# EAGLE board nutzen_04 (EAGLE 9.6.2), part 1 of 3
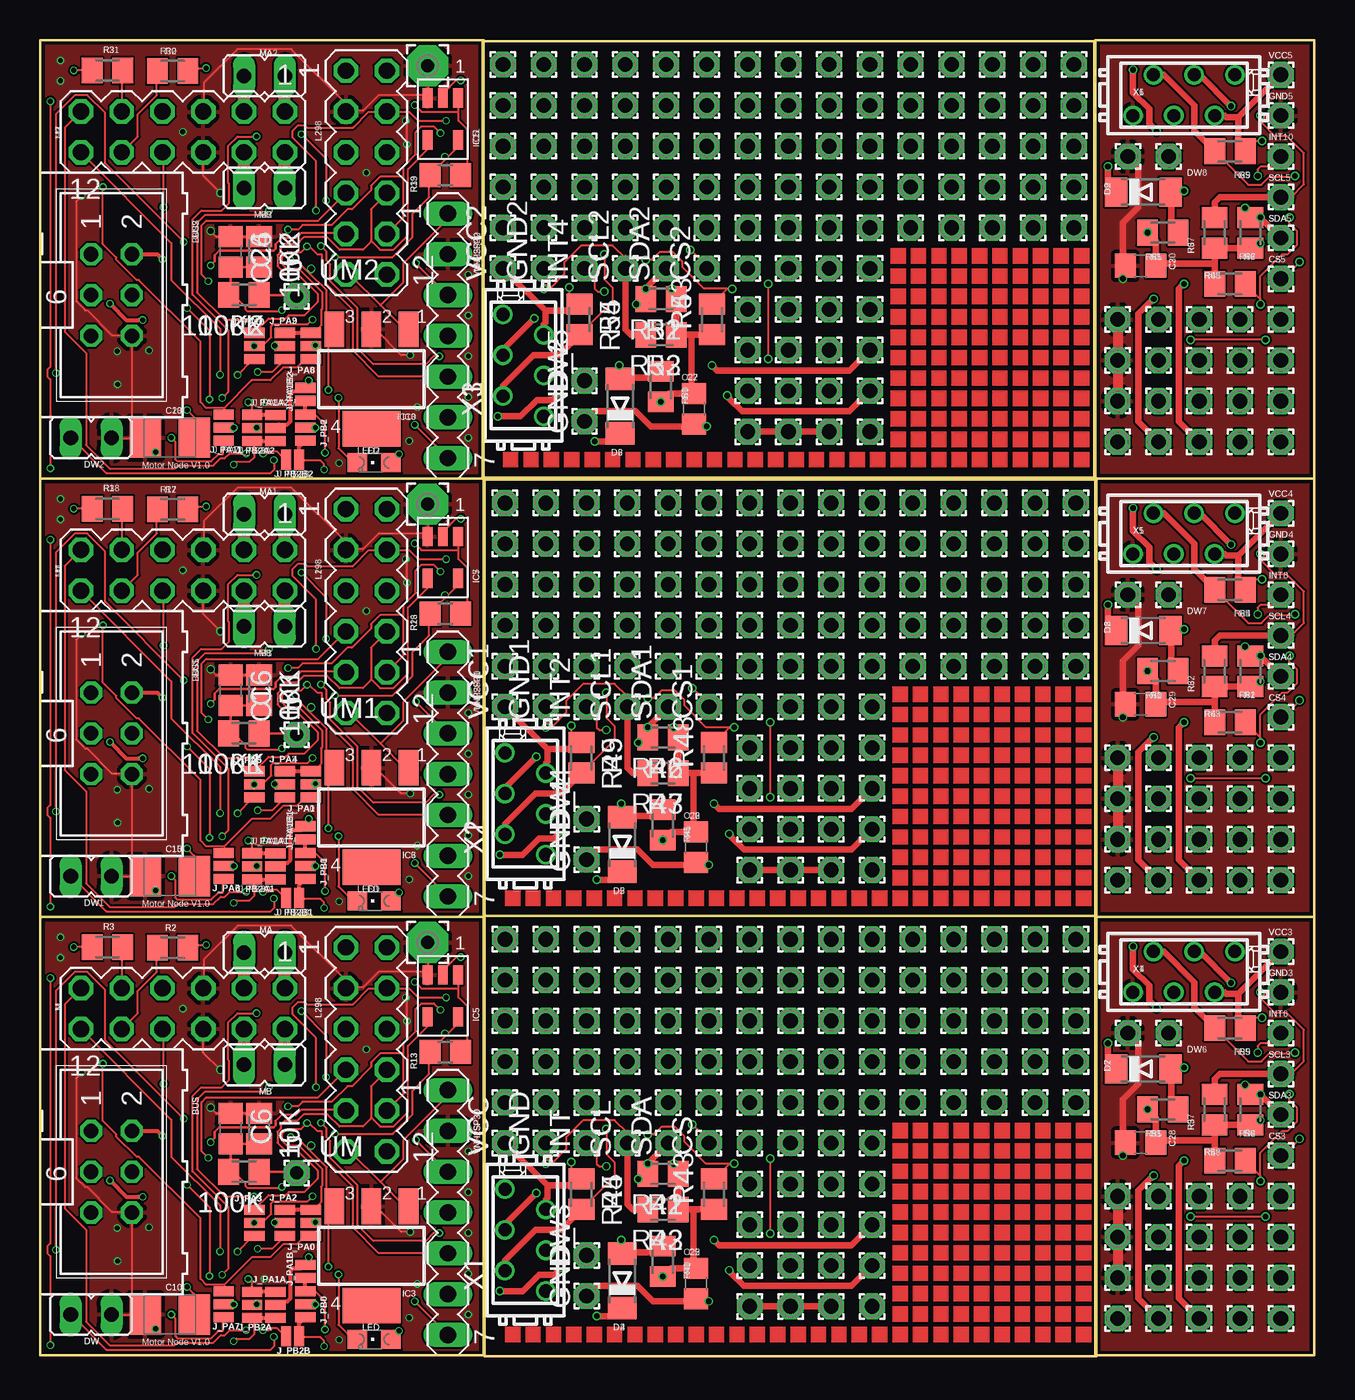
[diagram p0: board, top side]
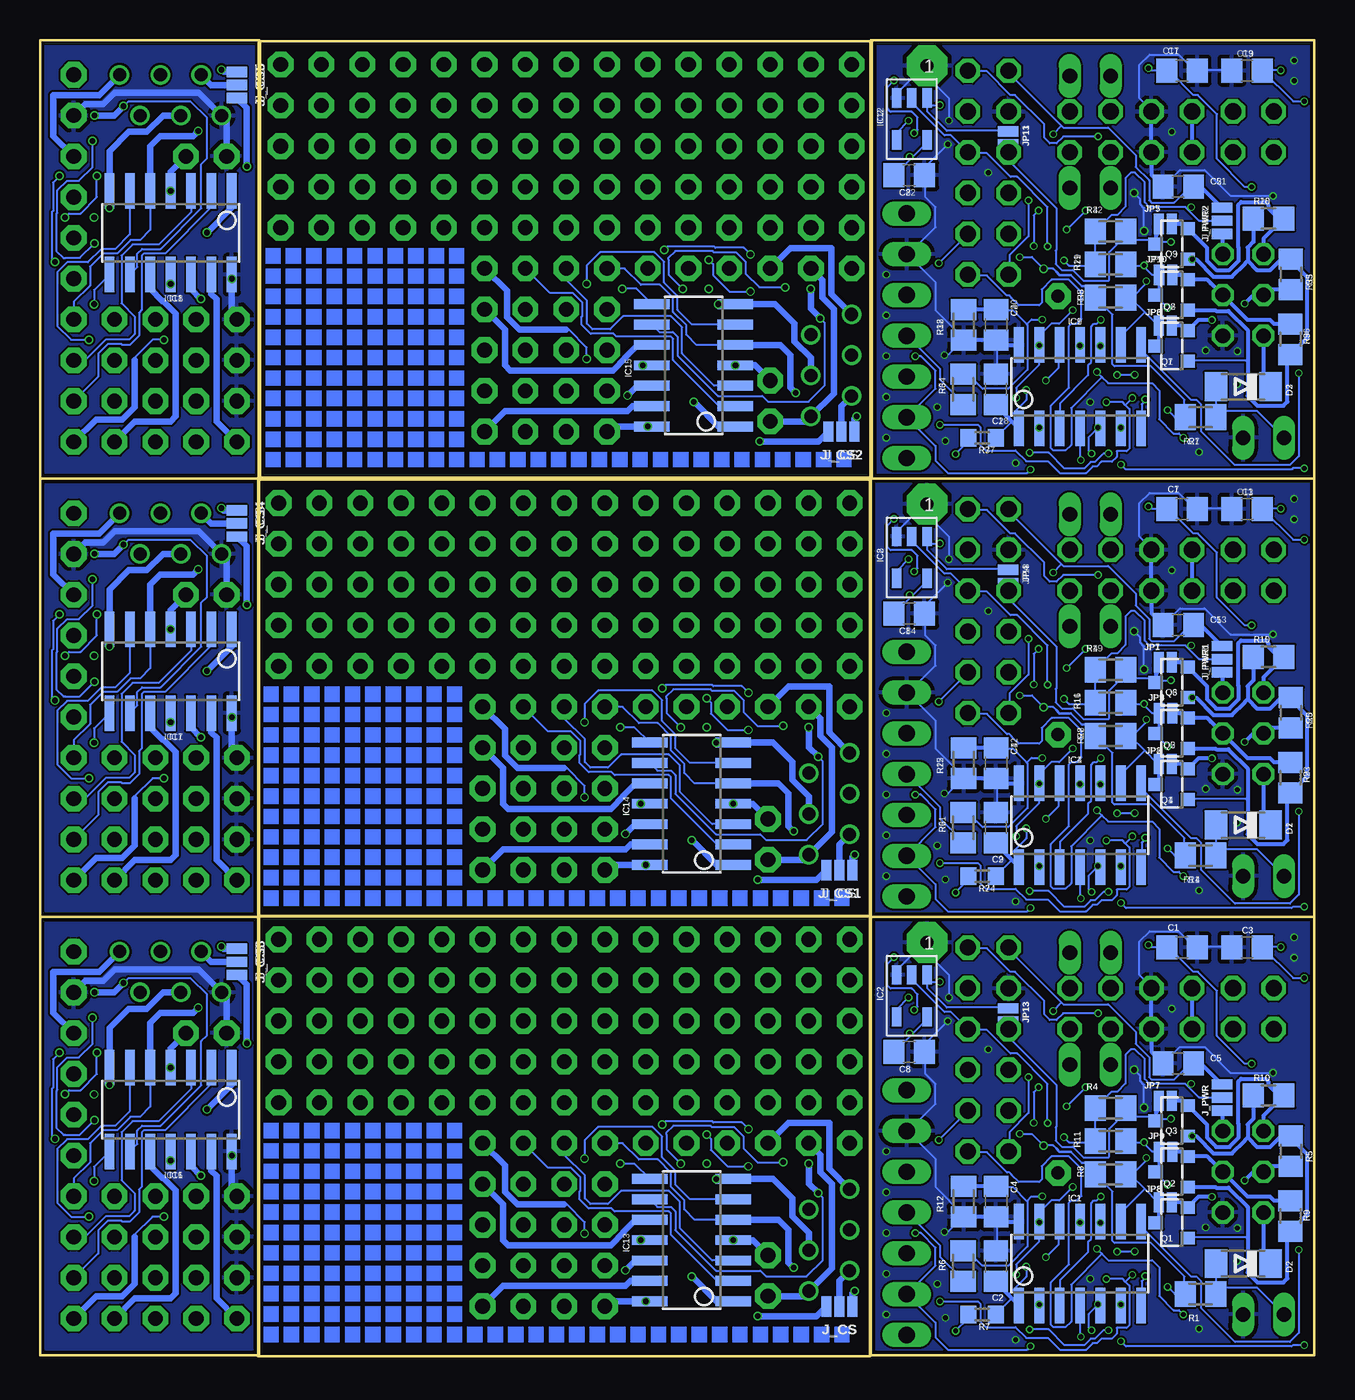
[diagram p1: board, bottom side, seen from below]

Size 79.38 x 81.98 mm. Coordinates in mm from the lower left corner, seen from the top.
Outline: 0,0.06 27.61,0.06 27.61,27.36 0,27.36 0,0.06
Outline: 0,0.06 27.62,0.06 27.62,27.37
Outline: 0,27.37 0,0.06
Outline: 0,27.37 27.61,27.37 27.61,54.66 0,54.66 0,27.37
Outline: 0,27.37 27.62,27.37
Outline: 27.62,27.37 27.62,54.67
Outline: 0,54.67 0,27.37
Outline: 0,54.67 27.61,54.67 27.61,81.97 0,81.97 0,54.67
Outline: 0,54.67 27.62,54.67
Outline: 27.62,54.67 27.62,81.98 0,81.98 0,54.67
Outline: 65.79,27.43 65.79,0 27.69,0 27.69,27.43
Outline: 65.79,27.43 27.69,27.43
Outline: 65.79,27.43 65.79,54.61 27.69,54.61 27.69,27.43
Outline: 27.69,27.43 65.79,27.43
Outline: 79.38,27.37 79.38,0.06 65.72,0.06 65.72,27.37
Outline: 79.38,27.37 65.72,27.37
Outline: 65.72,27.37 79.38,27.37
Outline: 79.38,27.37 79.38,54.67
Outline: 79.38,54.67 65.72,54.67
Outline: 65.72,54.67 65.72,27.37
Outline: 65.72,54.67 79.38,54.67
Outline: 79.38,54.67 79.38,81.98 65.72,81.98 65.72,54.67
Outline: 65.66,54.74 65.66,81.92 27.56,81.92 27.56,54.74 65.66,54.74
Copper layers (1*16): Top 0.035559375mm / dielectric 1.6mm / Bottom 0.035559375mm
Design rules "jlcpcb2layer": minimum track width 5mil, minimum drill 12mil, track to track 5mil, track to pad 5mil, pad to pad 5mil, via to via 5mil, smd to smd 5mil, copper to edge 8mil, drill to drill 6mil, minimum pad ring 5mil, minimum via ring 3mil, stop-mask expansion 2.5mil, vias tented up to drill 0mil, thermal gap 10mil
Net classes: 2 power: width 0.762 mm, drill 0.762 mm
Milling: 5 lines

## Footprints (pad centres in the part's own frame; a part is rotated, then mirrored left to right if it is on the bottom)
M0805 = smd 1.3 x 1.6: 1 -0.95,0; 2 0.95,0
ML6 = drill 0.914 octagon: 1 -2.54,-1.27; 2 -2.54,1.27; 3 0,-1.27; 4 0,1.27; 5 2.54,-1.27; 6 2.54,1.27
C0805 = smd 1.3 x 1.5: 1 -0.95,0; 2 0.95,0
B/3528-21R = smd 1.95 x 2.5: + 1.525,0; - -1.525,0
1,6/0,9 = drill 0.914 pad 1.6 octagon: 1 0,0
MINIMELF = smd 1.4 x 1.8: A 1.7,0; C -1.7,0
JP1 = drill 0.914 long: 1 0,-1.27; 2 0,1.27
SOIC14 = smd 0.61 x 2.21: 1 -3.81,-2.603; 2 -2.54,-2.603; 3 -1.27,-2.603; 4 0,-2.603; 5 1.27,-2.603; 6 2.54,-2.603; 7 3.81,-2.603; 8 3.81,2.603; 9 2.54,2.603; 10 1.27,2.603; 11 0,2.603; 12 -1.27,2.603; 13 -2.54,2.603; 14 -3.81,2.603
SOT-23/5 = smd 0.6 x 1.2: 1 -0.95,-1.306; 2 0,-1.306; 3 0.95,-1.306; 4 0.95,1.306; 5 -0.95,1.306
SOT223 = smd 1.219 x 2.235: 1 -2.311,-3.099; 2 0,-3.099; 3 2.311,-3.099 | smd 3.6 x 2.2: 4 0,3.099
SMT-JUMPER_3_1-NC_PASTE_NO-SILK = smd 0.635 x 1.27: 1 -0.813,0; 2 0,0; 3 0.813,0
SMT-JUMPER_2_NO_NO-SILK = smd 0.635 x 1.27: 1 -0.406,0; 2 0.406,0
SMT-JUMPER_2_NC_PASTE_NO-SILK = smd 0.635 x 1.27: 1 -0.406,0; 2 0.406,0
MA06-2 = drill 1.016 octagon: 1 -6.35,-1.27; 2 -6.35,1.27; 3 -3.81,-1.27; 4 -3.81,1.27; 5 -1.27,-1.27; 6 -1.27,1.27; 7 1.27,-1.27; 8 1.27,1.27; 9 3.81,-1.27; 10 3.81,1.27; 11 6.35,-1.27; 12 6.35,1.27
CHIPLED_0805 = smd 1.2 x 1.2: A 0,-1.05; C 0,1.05
1,6/0,8 = drill 0.813 pad 1.6 octagon: 1 0,0
2,54/0,8 = drill 0.813 pad 2.54 octagon: 1 0,0
SOT23 = smd 0.8 x 0.9: 1 -0.95,-1; 2 0.95,-1; 3 0,1
R0805 = smd 1.3 x 1.5: 1 -0.95,0; 2 0.95,0
R0603 = smd 1 x 1.1: 1 -0.85,0; 2 0.85,0
MA07-1 = drill 1.016 long: 1 -7.62,0; 2 -5.08,0; 3 -2.54,0; 4 0,0; 5 2.54,0; 6 5.08,0; 7 7.62,0
MICROMATCH-6 = drill 0.813: 1 3.175,1.27; 2 1.905,-1.27; 3 0.635,1.27; 4 -0.635,-1.27; 5 -1.905,1.27; 6 -3.175,-1.27

## Placement (x,y rotation side)
10K  10k  [M0805]  13.64,14.19 270 top
10K1  10k  [M0805]  13.64,41.49 270 top
10K2  10k  [M0805]  13.64,68.8 270 top
100K  10k  [M0805]  12.7,11.49 180 top
100K1  10k  [M0805]  12.7,38.8 180 top
100K2  10k  [M0805]  12.7,66.1 180 top
BUS  [ML6]  4.45,11.49 270 top
BUS1  [ML6]  4.45,38.8 270 top
BUS2  [ML6]  4.45,66.1 270 top
C1  1n  [C0805]  8.26,25.46 180 bottom
C2  100n  [C0805]  19.85,5.63 90 bottom
C3  1n  [C0805]  4.19,25.47 180 bottom
C4  100n  [C0805]  19.83,9.64 90 bottom
C5  0.1  [C0805]  8.48,18.25 180 bottom
C6  100n  [C0805]  11.86,14.19 270 top
C7  1n  [C0805]  8.26,52.77 180 bottom
C8  0.1  [C0805]  25.24,18.95 0 bottom
C9  100n  [C0805]  19.85,32.93 90 bottom
C10  100uF/6V  [B/3528-21R]  8.08,2.6 0 top
C11  1n  [C0805]  4.19,52.77 180 bottom
C12  100n  [C0805]  19.83,36.94 90 bottom
C13  0.1  [C0805]  8.48,45.55 180 bottom
C14  0.1  [C0805]  25.24,46.26 0 bottom
C15  100uF/6V  [B/3528-21R]  8.08,29.91 0 top
C16  100n  [C0805]  11.86,41.49 270 top
C17  1n  [C0805]  8.26,80.07 180 bottom
C18  100n  [C0805]  19.85,60.24 90 bottom
C19  1n  [C0805]  4.19,80.08 180 bottom
C20  100n  [C0805]  19.83,64.25 90 bottom
C21  0.1  [C0805]  8.48,72.86 180 bottom
C22  0.1  [C0805]  25.24,73.56 0 bottom
C23  100uF/6V  [B/3528-21R]  8.08,57.21 0 top
C24  100n  [C0805]  11.86,68.8 270 top
C25  100n  [C0805]  40.86,4.53 270 top
C26  100n  [C0805]  40.86,31.71 270 top
C27  100n  [C0805]  40.73,59.02 270 top
C28  100n  [C0805]  68.54,13.31 180 top
C29  100n  [C0805]  68.54,40.61 180 top
C30  100n  [C0805]  68.54,67.92 180 top
CS  [1,6/0,9]  41.66,13.27 90 top
CS1  [1,6/0,9]  41.66,40.45 90 top
CS2  [1,6/0,9]  41.53,67.75 90 top
CS3  [1,6/0,9]  77.28,12.51 0 top
CS4  [1,6/0,9]  77.28,39.81 0 top
CS5  [1,6/0,9]  77.28,67.12 0 top
D1  [MINIMELF]  4.45,33.08 180 bottom
D2  [MINIMELF]  4.45,5.78 180 bottom
D3  [MINIMELF]  4.45,60.39 180 bottom
D4  [MINIMELF]  36.26,4.7 90 top
D5  [MINIMELF]  36.26,31.88 90 top
D6  [MINIMELF]  36.13,59.18 90 top
D7  [MINIMELF]  68.71,17.91 0 top
D8  [MINIMELF]  68.71,45.21 0 top
D9  [MINIMELF]  68.71,72.52 0 top
DW  [JP1]  3.17,2.6 270 top
DW1  [JP1]  3.17,29.91 270 top
DW2  [JP1]  3.17,57.21 270 top
DW3  [1,6/0,9]  34.04,6.29 90 top
DW4  [1,6/0,9]  34.04,33.46 90 top
DW5  [1,6/0,9]  33.91,60.77 90 top
DW6  [1,6/0,9]  70.29,20.13 0 top
DW7  [1,6/0,9]  70.29,47.43 0 top
DW8  [1,6/0,9]  70.29,74.74 0 top
GND  [1,6/0,9]  31.5,13.27 90 top
GND1  [1,6/0,9]  31.5,40.45 90 top
GND2  [1,6/0,9]  31.37,67.75 90 top
GND3  [1,6/0,9]  77.28,22.67 0 top
GND4  [1,6/0,9]  77.28,49.97 0 top
GND5  [1,6/0,9]  77.28,77.28 0 top
GND_  [1,6/0,9]  34.04,3.75 90 top
GND_1  [1,6/0,9]  34.04,30.92 90 top
GND_2  [1,6/0,9]  33.91,58.23 90 top
GND_3  [1,6/0,9]  67.75,20.13 0 top
GND_4  [1,6/0,9]  67.75,47.43 0 top
GND_5  [1,6/0,9]  67.75,74.74 0 top
IC1  TINY84 or TINY841  [SOIC14]  14.61,5.78 0 bottom
IC2  [SOT-23/5]  25.08,22.45 180 bottom
IC3  MCP1703DB  [SOT223]  20.64,6.25 180 top
IC4  TINY84 or TINY841  [SOIC14]  14.61,33.08 0 bottom
IC5  [SOT-23/5]  25.08,22.45 180 top
IC6  MCP1703DB  [SOT223]  20.64,33.56 180 top
IC7  [SOT-23/5]  25.08,49.76 180 top
IC8  [SOT-23/5]  25.08,49.76 180 bottom
IC9  TINY84 or TINY841  [SOIC14]  14.61,60.39 0 bottom
IC10  MCP1703DB  [SOT223]  20.64,60.86 180 top
IC11  [SOT-23/5]  25.08,77.06 180 top
IC12  [SOT-23/5]  25.08,77.06 180 bottom
IC13  TINY84 or TINY841  [SOIC14]  38.8,7.24 90 bottom
IC14  TINY84 or TINY841  [SOIC14]  38.8,34.42 90 bottom
IC15  TINY84 or TINY841  [SOIC14]  38.67,61.72 90 bottom
IC16  TINY84 or TINY841  [SOIC14]  71.25,15.37 180 bottom
IC17  TINY84 or TINY841  [SOIC14]  71.25,42.67 180 bottom
IC18  TINY84 or TINY841  [SOIC14]  71.25,69.98 180 bottom
INT  [1,6/0,9]  34.04,13.27 90 top
INT0  [1,6/0,9]  44.2,13.27 90 top
INT1  [1,6/0,9]  44.2,40.45 90 top
INT2  [1,6/0,9]  34.04,40.45 90 top
INT3  [1,6/0,9]  44.07,67.75 90 top
INT4  [1,6/0,9]  33.91,67.75 90 top
INT5  [1,6/0,9]  77.28,9.97 0 top
INT6  [1,6/0,9]  77.28,20.13 0 top
INT7  [1,6/0,9]  77.28,37.27 0 top
INT8  [1,6/0,9]  77.28,47.43 0 top
INT9  [1,6/0,9]  77.28,64.58 0 top
INT10  [1,6/0,9]  77.28,74.74 0 top
J_CS  [SMT-JUMPER_3_1-NC_PASTE_NO-SILK]  29.59,3.11 180 bottom
J_CS1  [SMT-JUMPER_3_1-NC_PASTE_NO-SILK]  29.59,30.29 180 bottom
J_CS2  [SMT-JUMPER_3_1-NC_PASTE_NO-SILK]  29.46,57.59 180 bottom
J_CS3  [SMT-JUMPER_3_1-NC_PASTE_NO-SILK]  67.12,24.57 270 bottom
J_CS4  [SMT-JUMPER_3_1-NC_PASTE_NO-SILK]  67.12,51.88 270 bottom
J_CS5  [SMT-JUMPER_3_1-NC_PASTE_NO-SILK]  67.12,79.18 270 bottom
J_PA0  [SMT-JUMPER_3_1-NC_PASTE_NO-SILK]  16.87,8.32 270 top
J_PA1  [SMT-JUMPER_3_1-NC_PASTE_NO-SILK]  16.87,35.62 270 top
J_PA1A  [SMT-JUMPER_3_1-NC_PASTE_NO-SILK]  14.64,3.21 270 top
J_PA1A1  [SMT-JUMPER_3_1-NC_PASTE_NO-SILK]  14.64,30.51 270 top
J_PA1A2  [SMT-JUMPER_3_1-NC_PASTE_NO-SILK]  14.64,57.82 270 top
J_PA1B  [SMT-JUMPER_2_NO_NO-SILK]  16.51,5.3 270 top
J_PA1B1  [SMT-JUMPER_2_NO_NO-SILK]  16.51,32.61 270 top
J_PA1B2  [SMT-JUMPER_2_NO_NO-SILK]  16.51,59.91 270 top
J_PA2  [SMT-JUMPER_3_1-NC_PASTE_NO-SILK]  15.24,8.32 90 top
J_PA3  [SMT-JUMPER_3_1-NC_PASTE_NO-SILK]  13.34,8.32 90 top
J_PA4  [SMT-JUMPER_3_1-NC_PASTE_NO-SILK]  15.24,35.62 90 top
J_PA5  [SMT-JUMPER_3_1-NC_PASTE_NO-SILK]  13.34,35.62 90 top
J_PA6  [SMT-JUMPER_3_1-NC_PASTE_NO-SILK]  11.43,30.54 270 top
J_PA7  [SMT-JUMPER_3_1-NC_PASTE_NO-SILK]  11.43,3.24 270 top
J_PA8  [SMT-JUMPER_3_1-NC_PASTE_NO-SILK]  16.87,62.93 270 top
J_PA9  [SMT-JUMPER_3_1-NC_PASTE_NO-SILK]  15.24,62.93 90 top
J_PA10  [SMT-JUMPER_3_1-NC_PASTE_NO-SILK]  13.34,62.93 90 top
J_PA11  [SMT-JUMPER_3_1-NC_PASTE_NO-SILK]  11.43,57.85 270 top
J_PB0  [SMT-JUMPER_3_1-NC_PASTE_NO-SILK]  16.51,3.24 270 top
J_PB1  [SMT-JUMPER_3_1-NC_PASTE_NO-SILK]  16.51,30.54 270 top
J_PB2  [SMT-JUMPER_3_1-NC_PASTE_NO-SILK]  16.51,57.85 270 top
J_PB2A  [SMT-JUMPER_3_1-NC_PASTE_NO-SILK]  13.21,3.21 90 top
J_PB2A1  [SMT-JUMPER_3_1-NC_PASTE_NO-SILK]  13.21,30.52 90 top
J_PB2A2  [SMT-JUMPER_3_1-NC_PASTE_NO-SILK]  13.21,57.82 90 top
J_PB2B  [SMT-JUMPER_2_NO_NO-SILK]  15.74,1.24 180 top
J_PB2B1  [SMT-JUMPER_2_NO_NO-SILK]  15.74,28.55 180 top
J_PB2B2  [SMT-JUMPER_2_NO_NO-SILK]  15.74,55.85 180 top
J_PWR  [SMT-JUMPER_3_1-NC_PASTE_NO-SILK]  5.77,16.12 270 bottom
J_PWR1  [SMT-JUMPER_3_1-NC_PASTE_NO-SILK]  5.77,43.42 270 bottom
J_PWR2  [SMT-JUMPER_3_1-NC_PASTE_NO-SILK]  5.77,70.73 270 bottom
JP1  [SMT-JUMPER_2_NC_PASTE_NO-SILK]  9.3,43.22 180 bottom
JP2  [SMT-JUMPER_2_NC_PASTE_NO-SILK]  9.3,36.89 180 bottom
JP3  [SMT-JUMPER_2_NC_PASTE_NO-SILK]  9.27,40.04 180 bottom
JP4  [SMT-JUMPER_2_NO_NO-SILK]  19.08,48.58 90 bottom
JP5  [SMT-JUMPER_2_NC_PASTE_NO-SILK]  9.3,70.52 180 bottom
JP6  [SMT-JUMPER_2_NC_PASTE_NO-SILK]  9.3,64.2 180 bottom
JP7  [SMT-JUMPER_2_NC_PASTE_NO-SILK]  9.3,15.91 180 bottom
JP8  [SMT-JUMPER_2_NC_PASTE_NO-SILK]  9.3,9.59 180 bottom
JP9  [SMT-JUMPER_2_NC_PASTE_NO-SILK]  9.27,12.74 180 bottom
JP10  [SMT-JUMPER_2_NC_PASTE_NO-SILK]  9.27,67.35 180 bottom
JP11  [SMT-JUMPER_2_NO_NO-SILK]  19.08,75.88 90 bottom
JP13  [SMT-JUMPER_2_NO_NO-SILK]  19.08,21.27 90 bottom
L1  [MA06-2]  20.32,46.42 270 top
L2  [MA06-2]  20.32,73.72 270 top
L298  [MA06-2]  20.32,19.11 270 top
LED  [CHIPLED_0805]  20.8,1.05 90 top
LED1  [CHIPLED_0805]  20.8,28.36 90 top
LED2  [CHIPLED_0805]  20.8,55.66 90 top
M  [MA06-2]  8.89,21.65 180 top
M1  [MA06-2]  8.89,48.96 180 top
M2  [MA06-2]  8.89,76.26 180 top
MA  [JP1]  13.97,25.15 270 top
MA1  [JP1]  13.97,52.45 270 top
MA2  [JP1]  13.97,79.76 270 top
MB  [JP1]  13.97,18.16 90 top
MB1  [JP1]  13.97,45.47 90 top
MB2  [JP1]  13.97,72.77 90 top
P_UM  [1,6/0,8]  15.98,11.42 0 top
P_UM1  [1,6/0,8]  15.98,38.72 0 top
P_UM2  [1,6/0,8]  15.98,66.03 0 top
PA0  [1,6/0,9]  51.82,3.11 90 top
PA1  [1,6/0,9]  51.82,5.65 90 top
PA2  [1,6/0,9]  51.82,8.19 90 top
PA3  [1,6/0,9]  51.82,10.73 90 top
PA4  [1,6/0,9]  51.82,30.29 90 top
PA5  [1,6/0,9]  51.82,32.83 90 top
PA6  [1,6/0,9]  51.82,35.37 90 top
PA7  [1,6/0,9]  51.82,13.27 90 top
PA8  [1,6/0,9]  51.82,37.91 90 top
PA9  [1,6/0,9]  51.82,40.45 90 top
PA10  [1,6/0,9]  51.69,57.59 90 top
PA11  [1,6/0,9]  51.69,60.13 90 top
PA12  [1,6/0,9]  51.69,62.67 90 top
PA13  [1,6/0,9]  51.69,65.21 90 top
PA14  [1,6/0,9]  51.69,67.75 90 top
PA15  [1,6/0,9]  67.12,2.35 0 top
PA16  [1,6/0,9]  69.66,2.35 0 top
PA17  [1,6/0,9]  72.2,2.35 0 top
PA18  [1,6/0,9]  74.74,2.35 0 top
PA19  [1,6/0,9]  77.28,2.35 0 top
PA20  [1,6/0,9]  67.12,29.65 0 top
PA21  [1,6/0,9]  69.66,29.65 0 top
PA22  [1,6/0,9]  72.2,29.65 0 top
PA23  [1,6/0,9]  74.74,29.65 0 top
PA24  [1,6/0,9]  77.28,29.65 0 top
PA25  [1,6/0,9]  67.12,56.96 0 top
PA26  [1,6/0,9]  69.66,56.96 0 top
PA27  [1,6/0,9]  72.2,56.96 0 top
PA28  [1,6/0,9]  74.74,56.96 0 top
PA29  [1,6/0,9]  77.28,56.96 0 top
PAD1  [2,54/0,8]  24.13,25.78 0 top
PAD2  [2,54/0,8]  24.13,53.09 0 top
PAD3  [2,54/0,8]  24.13,80.39 0 top
PAD4  [1,6/0,9]  64.52,15.81 90 top
PAD5  [1,6/0,9]  64.52,18.35 90 top
PAD6  [1,6/0,9]  64.52,20.89 90 top
PAD7  [1,6/0,9]  64.52,23.43 90 top
PAD8  [1,6/0,9]  64.52,25.97 90 top
PAD9  [1,6/0,9]  61.98,25.97 90 top
PAD10  [1,6/0,9]  61.98,23.43 90 top
PAD11  [1,6/0,9]  61.98,15.81 90 top
PAD12  [1,6/0,9]  61.98,20.89 90 top
PAD13  [1,6/0,9]  61.98,18.35 90 top
PAD14  [1,6/0,9]  59.44,15.81 90 top
PAD15  [1,6/0,9]  59.44,18.35 90 top
PAD16  [1,6/0,9]  59.44,23.43 90 top
PAD17  [1,6/0,9]  59.44,20.89 90 top
PAD18  [1,6/0,9]  59.44,25.97 90 top
PAD19  [1,6/0,9]  56.9,15.81 90 top
PAD20  [1,6/0,9]  56.9,18.35 90 top
PAD21  [1,6/0,9]  56.9,20.89 90 top
PAD22  [1,6/0,9]  56.9,23.43 90 top
PAD23  [1,6/0,9]  64.52,42.99 90 top
PAD24  [1,6/0,9]  56.9,25.97 90 top
PAD25  [1,6/0,9]  54.36,15.81 90 top
PAD26  [1,6/0,9]  46.74,25.97 90 top
PAD27  [1,6/0,9]  64.52,45.53 90 top
PAD28  [1,6/0,9]  46.74,15.81 90 top
PAD29  [1,6/0,9]  46.74,20.89 90 top
PAD30  [1,6/0,9]  46.74,23.43 90 top
PAD31  [1,6/0,9]  49.28,23.43 90 top
PAD32  [1,6/0,9]  64.52,48.07 90 top
PAD33  [1,6/0,9]  46.74,18.35 90 top
PAD34  [1,6/0,9]  49.28,15.81 90 top
PAD35  [1,6/0,9]  49.28,18.35 90 top
PAD36  [1,6/0,9]  49.28,25.97 90 top
PAD37  [1,6/0,9]  51.82,15.81 90 top
PAD38  [1,6/0,9]  51.82,18.35 90 top
PAD39  [1,6/0,9]  49.28,20.89 90 top
PAD40  [1,6/0,9]  54.36,23.43 90 top
PAD41  [1,6/0,9]  64.52,50.61 90 top
PAD42  [1,6/0,9]  64.52,53.15 90 top
PAD43  [1,6/0,9]  54.36,20.89 90 top
PAD44  [1,6/0,9]  54.36,25.97 90 top
PAD45  [1,6/0,9]  51.82,25.97 90 top
PAD46  [1,6/0,9]  54.36,18.35 90 top
PAD47  [1,6/0,9]  51.82,20.89 90 top
PAD48  [1,6/0,9]  51.82,23.43 90 top
PAD49  [1,6/0,9]  44.2,15.81 90 top
PAD50  [1,6/0,9]  44.2,20.89 90 top
PAD51  [1,6/0,9]  41.66,18.35 90 top
PAD52  [1,6/0,9]  41.66,15.81 90 top
PAD53  [1,6/0,9]  44.2,25.97 90 top
PAD54  [1,6/0,9]  44.2,18.35 90 top
PAD55  [1,6/0,9]  44.2,23.43 90 top
PAD56  [1,6/0,9]  41.66,23.43 90 top
PAD57  [1,6/0,9]  41.66,20.89 90 top
PAD58  [1,6/0,9]  61.98,53.15 90 top
PAD59  [1,6/0,9]  39.12,23.43 90 top
PAD60  [1,6/0,9]  39.12,20.89 90 top
PAD61  [1,6/0,9]  39.12,18.35 90 top
PAD62  [1,6/0,9]  41.66,25.97 90 top
PAD63  [1,6/0,9]  61.98,50.61 90 top
PAD64  [1,6/0,9]  61.98,42.99 90 top
PAD65  [1,6/0,9]  36.58,18.35 90 top
PAD66  [1,6/0,9]  36.58,15.81 90 top
PAD67  [1,6/0,9]  39.12,25.97 90 top
PAD68  [1,6/0,9]  39.12,15.81 90 top
PAD69  [1,6/0,9]  36.58,20.89 90 top
PAD70  [1,6/0,9]  36.58,23.43 90 top
PAD71  [1,6/0,9]  36.58,25.97 90 top
PAD72  [1,6/0,9]  34.04,15.81 90 top
PAD73  [1,6/0,9]  61.98,48.07 90 top
PAD74  [1,6/0,9]  34.04,18.35 90 top
PAD75  [1,6/0,9]  34.04,20.89 90 top
PAD76  [1,6/0,9]  34.04,23.43 90 top
PAD77  [1,6/0,9]  61.98,45.53 90 top
PAD78  [1,6/0,9]  34.04,25.97 90 top
PAD79  [1,6/0,9]  31.5,20.89 90 top
PAD80  [1,6/0,9]  31.5,18.35 90 top
PAD81  [1,6/0,9]  31.5,23.43 90 top
PAD82  [1,6/0,9]  31.5,25.97 90 top
PAD83  [1,6/0,9]  31.5,15.81 90 top
PAD84  [1,6/0,9]  28.96,23.43 90 top
PAD85  [1,6/0,9]  28.96,20.89 90 top
PAD86  [1,6/0,9]  28.96,15.81 90 top
PAD87  [1,6/0,9]  28.96,18.35 90 top
PAD88  [1,6/0,9]  59.44,42.99 90 top
PAD89  [1,6/0,9]  44.2,5.65 90 top
PAD90  [1,6/0,9]  46.74,5.65 90 top
PAD91  [1,6/0,9]  49.28,8.19 90 top
PAD92  [1,6/0,9]  59.44,45.53 90 top
PAD93  [1,6/0,9]  28.96,25.97 90 top
PAD94  [1,6/0,9]  49.28,10.73 90 top
PAD95  [1,6/0,9]  46.74,10.73 90 top
PAD96  [1,6/0,9]  49.28,5.65 90 top
PAD97  [1,6/0,9]  44.2,10.73 90 top
PAD98  [1,6/0,9]  44.2,8.19 90 top
PAD99  [1,6/0,9]  46.74,8.19 90 top
PAD100  [1,6/0,9]  49.28,3.11 90 top
PAD101  [1,6/0,9]  44.2,3.11 90 top
PAD102  [1,6/0,9]  46.74,3.11 90 top
PAD103  [1,6/0,9]  59.44,50.61 90 top
PAD104  [1,6/0,9]  59.44,48.07 90 top
PAD105  [1,6/0,9]  59.44,53.15 90 top
PAD106  [1,6/0,9]  56.9,42.99 90 top
PAD107  [1,6/0,9]  56.9,45.53 90 top
PAD108  [1,6/0,9]  56.9,48.07 90 top
PAD109  [1,6/0,9]  56.9,50.61 90 top
PAD110  [1,6/0,9]  56.9,53.15 90 top
PAD111  [1,6/0,9]  54.36,42.99 90 top
PAD112  [1,6/0,9]  46.74,53.15 90 top
PAD113  [1,6/0,9]  46.74,42.99 90 top
PAD114  [1,6/0,9]  46.74,48.07 90 top
PAD115  [1,6/0,9]  46.74,50.61 90 top
PAD116  [1,6/0,9]  49.28,50.61 90 top
PAD117  [1,6/0,9]  46.74,45.53 90 top
PAD118  [1,6/0,9]  49.28,42.99 90 top
PAD119  [1,6/0,9]  49.28,45.53 90 top
PAD120  [1,6/0,9]  49.28,53.15 90 top
PAD121  [1,6/0,9]  51.82,42.99 90 top
PAD122  [1,6/0,9]  51.82,45.53 90 top
PAD123  [1,6/0,9]  49.28,48.07 90 top
PAD124  [1,6/0,9]  54.36,50.61 90 top
PAD125  [1,6/0,9]  54.36,48.07 90 top
PAD126  [1,6/0,9]  54.36,53.15 90 top
PAD127  [1,6/0,9]  51.82,53.15 90 top
PAD128  [1,6/0,9]  54.36,45.53 90 top
PAD129  [1,6/0,9]  51.82,48.07 90 top
PAD130  [1,6/0,9]  51.82,50.61 90 top
PAD131  [1,6/0,9]  44.2,42.99 90 top
PAD132  [1,6/0,9]  44.2,48.07 90 top
PAD133  [1,6/0,9]  41.66,45.53 90 top
PAD134  [1,6/0,9]  41.66,42.99 90 top
PAD135  [1,6/0,9]  44.2,53.15 90 top
PAD136  [1,6/0,9]  44.2,45.53 90 top
PAD137  [1,6/0,9]  44.2,50.61 90 top
PAD138  [1,6/0,9]  41.66,50.61 90 top
PAD139  [1,6/0,9]  41.66,48.07 90 top
PAD140  [1,6/0,9]  39.12,50.61 90 top
PAD141  [1,6/0,9]  39.12,48.07 90 top
PAD142  [1,6/0,9]  39.12,45.53 90 top
PAD143  [1,6/0,9]  41.66,53.15 90 top
PAD144  [1,6/0,9]  36.58,45.53 90 top
PAD145  [1,6/0,9]  36.58,42.99 90 top
PAD146  [1,6/0,9]  39.12,53.15 90 top
PAD147  [1,6/0,9]  39.12,42.99 90 top
PAD148  [1,6/0,9]  36.58,48.07 90 top
PAD149  [1,6/0,9]  36.58,50.61 90 top
PAD150  [1,6/0,9]  36.58,53.15 90 top
PAD151  [1,6/0,9]  34.04,42.99 90 top
PAD152  [1,6/0,9]  34.04,45.53 90 top
PAD153  [1,6/0,9]  34.04,48.07 90 top
PAD154  [1,6/0,9]  34.04,50.61 90 top
PAD155  [1,6/0,9]  34.04,53.15 90 top
PAD156  [1,6/0,9]  31.5,48.07 90 top
PAD157  [1,6/0,9]  31.5,45.53 90 top
PAD158  [1,6/0,9]  31.5,50.61 90 top
PAD159  [1,6/0,9]  31.5,53.15 90 top
PAD160  [1,6/0,9]  31.5,42.99 90 top
PAD161  [1,6/0,9]  28.96,50.61 90 top
PAD162  [1,6/0,9]  28.96,48.07 90 top
PAD163  [1,6/0,9]  28.96,42.99 90 top
PAD164  [1,6/0,9]  28.96,45.53 90 top
PAD165  [1,6/0,9]  28.96,53.15 90 top
PAD166  [1,6/0,9]  44.2,32.83 90 top
PAD167  [1,6/0,9]  46.74,32.83 90 top
PAD168  [1,6/0,9]  49.28,35.37 90 top
PAD169  [1,6/0,9]  49.28,37.91 90 top
PAD170  [1,6/0,9]  46.74,37.91 90 top
PAD171  [1,6/0,9]  49.28,32.83 90 top
PAD172  [1,6/0,9]  44.2,37.91 90 top
PAD173  [1,6/0,9]  44.2,35.37 90 top
PAD174  [1,6/0,9]  46.74,35.37 90 top
PAD175  [1,6/0,9]  49.28,30.29 90 top
PAD176  [1,6/0,9]  44.2,30.29 90 top
PAD177  [1,6/0,9]  46.74,30.29 90 top
PAD178  [1,6/0,9]  64.39,70.29 90 top
PAD179  [1,6/0,9]  64.39,72.83 90 top
PAD180  [1,6/0,9]  64.39,75.37 90 top
PAD181  [1,6/0,9]  64.39,77.91 90 top
PAD182  [1,6/0,9]  64.39,80.45 90 top
PAD183  [1,6/0,9]  61.85,80.45 90 top
PAD184  [1,6/0,9]  61.85,77.91 90 top
PAD185  [1,6/0,9]  61.85,70.29 90 top
PAD186  [1,6/0,9]  61.85,75.37 90 top
PAD187  [1,6/0,9]  61.85,72.83 90 top
PAD188  [1,6/0,9]  59.31,70.29 90 top
PAD189  [1,6/0,9]  59.31,72.83 90 top
PAD190  [1,6/0,9]  59.31,77.91 90 top
PAD191  [1,6/0,9]  59.31,75.37 90 top
PAD192  [1,6/0,9]  59.31,80.45 90 top
PAD193  [1,6/0,9]  56.77,70.29 90 top
PAD194  [1,6/0,9]  56.77,72.83 90 top
PAD195  [1,6/0,9]  56.77,75.37 90 top
PAD196  [1,6/0,9]  56.77,77.91 90 top
PAD197  [1,6/0,9]  56.77,80.45 90 top
PAD198  [1,6/0,9]  54.23,70.29 90 top
PAD199  [1,6/0,9]  46.61,80.45 90 top
PAD200  [1,6/0,9]  46.61,70.29 90 top
PAD201  [1,6/0,9]  46.61,75.37 90 top
PAD202  [1,6/0,9]  46.61,77.91 90 top
PAD203  [1,6/0,9]  49.15,77.91 90 top
PAD204  [1,6/0,9]  46.61,72.83 90 top
PAD205  [1,6/0,9]  49.15,70.29 90 top
PAD206  [1,6/0,9]  49.15,72.83 90 top
PAD207  [1,6/0,9]  49.15,80.45 90 top
PAD208  [1,6/0,9]  51.69,70.29 90 top
PAD209  [1,6/0,9]  51.69,72.83 90 top
PAD210  [1,6/0,9]  49.15,75.37 90 top
PAD211  [1,6/0,9]  54.23,77.91 90 top
PAD212  [1,6/0,9]  54.23,75.37 90 top
PAD213  [1,6/0,9]  54.23,80.45 90 top
PAD214  [1,6/0,9]  51.69,80.45 90 top
PAD215  [1,6/0,9]  54.23,72.83 90 top
PAD216  [1,6/0,9]  51.69,75.37 90 top
PAD217  [1,6/0,9]  51.69,77.91 90 top
PAD218  [1,6/0,9]  44.07,70.29 90 top
PAD219  [1,6/0,9]  44.07,75.37 90 top
PAD220  [1,6/0,9]  41.53,72.83 90 top
PAD221  [1,6/0,9]  41.53,70.29 90 top
PAD222  [1,6/0,9]  44.07,80.45 90 top
PAD223  [1,6/0,9]  44.07,72.83 90 top
PAD224  [1,6/0,9]  44.07,77.91 90 top
PAD225  [1,6/0,9]  41.53,77.91 90 top
PAD226  [1,6/0,9]  41.53,75.37 90 top
PAD227  [1,6/0,9]  38.99,77.91 90 top
PAD228  [1,6/0,9]  38.99,75.37 90 top
PAD229  [1,6/0,9]  38.99,72.83 90 top
PAD230  [1,6/0,9]  41.53,80.45 90 top
PAD231  [1,6/0,9]  36.45,72.83 90 top
PAD232  [1,6/0,9]  36.45,70.29 90 top
PAD233  [1,6/0,9]  38.99,80.45 90 top
PAD234  [1,6/0,9]  38.99,70.29 90 top
PAD235  [1,6/0,9]  36.45,75.37 90 top
PAD236  [1,6/0,9]  36.45,77.91 90 top
PAD237  [1,6/0,9]  36.45,80.45 90 top
PAD238  [1,6/0,9]  33.91,70.29 90 top
PAD239  [1,6/0,9]  33.91,72.83 90 top
PAD240  [1,6/0,9]  33.91,75.37 90 top
PAD241  [1,6/0,9]  33.91,77.91 90 top
PAD242  [1,6/0,9]  33.91,80.45 90 top
PAD243  [1,6/0,9]  31.37,75.37 90 top
PAD244  [1,6/0,9]  31.37,72.83 90 top
PAD245  [1,6/0,9]  31.37,77.91 90 top
PAD246  [1,6/0,9]  31.37,80.45 90 top
PAD247  [1,6/0,9]  31.37,70.29 90 top
PAD248  [1,6/0,9]  28.83,77.91 90 top
PAD249  [1,6/0,9]  28.83,75.37 90 top
PAD250  [1,6/0,9]  28.83,70.29 90 top
PAD251  [1,6/0,9]  28.83,72.83 90 top
PAD252  [1,6/0,9]  28.83,80.45 90 top
PAD253  [1,6/0,9]  44.07,60.13 90 top
PAD254  [1,6/0,9]  46.61,60.13 90 top
PAD255  [1,6/0,9]  49.15,62.67 90 top
PAD256  [1,6/0,9]  49.15,65.21 90 top
PAD257  [1,6/0,9]  46.61,65.21 90 top
PAD258  [1,6/0,9]  49.15,60.13 90 top
PAD259  [1,6/0,9]  44.07,65.21 90 top
PAD260  [1,6/0,9]  44.07,62.67 90 top
PAD261  [1,6/0,9]  46.61,62.67 90 top
PAD262  [1,6/0,9]  49.15,57.59 90 top
PAD263  [1,6/0,9]  44.07,57.59 90 top
PAD264  [1,6/0,9]  46.61,57.59 90 top
PAD265  [1,6/0,9]  74.74,7.43 0 top
PAD266  [1,6/0,9]  72.2,7.43 0 top
PAD267  [1,6/0,9]  72.2,4.89 0 top
PAD268  [1,6/0,9]  72.2,9.97 0 top
PAD269  [1,6/0,9]  69.66,7.43 0 top
PAD270  [1,6/0,9]  69.66,4.89 0 top
PAD271  [1,6/0,9]  74.74,9.97 0 top
PAD272  [1,6/0,9]  74.74,4.89 0 top
PAD273  [1,6/0,9]  69.66,9.97 0 top
PAD274  [1,6/0,9]  67.12,9.97 0 top
PAD275  [1,6/0,9]  67.12,7.43 0 top
PAD276  [1,6/0,9]  67.12,4.89 0 top
PAD277  [1,6/0,9]  74.74,34.73 0 top
PAD278  [1,6/0,9]  72.2,34.73 0 top
PAD279  [1,6/0,9]  72.2,32.19 0 top
PAD280  [1,6/0,9]  72.2,37.27 0 top
PAD281  [1,6/0,9]  69.66,34.73 0 top
PAD282  [1,6/0,9]  69.66,32.19 0 top
PAD283  [1,6/0,9]  74.74,37.27 0 top
PAD284  [1,6/0,9]  74.74,32.19 0 top
PAD285  [1,6/0,9]  69.66,37.27 0 top
PAD286  [1,6/0,9]  67.12,37.27 0 top
PAD287  [1,6/0,9]  67.12,34.73 0 top
PAD288  [1,6/0,9]  67.12,32.19 0 top
PAD289  [1,6/0,9]  74.74,62.04 0 top
PAD290  [1,6/0,9]  72.2,62.04 0 top
PAD291  [1,6/0,9]  72.2,59.5 0 top
PAD292  [1,6/0,9]  72.2,64.58 0 top
PAD293  [1,6/0,9]  69.66,62.04 0 top
PAD294  [1,6/0,9]  69.66,59.5 0 top
PAD295  [1,6/0,9]  74.74,64.58 0 top
PAD296  [1,6/0,9]  74.74,59.5 0 top
PAD297  [1,6/0,9]  69.66,64.58 0 top
PAD298  [1,6/0,9]  67.12,64.58 0 top
PAD299  [1,6/0,9]  67.12,62.04 0 top
PAD300  [1,6/0,9]  67.12,59.5 0 top
PB0  [1,6/0,9]  49.28,13.27 90 top
PB1  [1,6/0,9]  46.74,13.27 90 top
PB2  [1,6/0,9]  49.28,40.45 90 top
PB3  [1,6/0,9]  46.74,40.45 90 top
PB4  [1,6/0,9]  49.15,67.75 90 top
PB5  [1,6/0,9]  46.61,67.75 90 top
PB6  [1,6/0,9]  77.28,4.89 0 top
PB7  [1,6/0,9]  77.28,7.43 0 top
PB8  [1,6/0,9]  77.28,32.19 0 top
PB9  [1,6/0,9]  77.28,34.73 0 top
PB10  [1,6/0,9]  77.28,59.5 0 top
PB11  [1,6/0,9]  77.28,62.04 0 top
Q1  BSS138  [SOT23]  8.89,8.32 90 bottom
Q2  BSS138  [SOT23]  8.89,11.49 90 bottom
Q3  BSS138  [SOT23]  8.89,14.67 90 bottom
Q4  BSS138  [SOT23]  8.89,35.62 90 bottom
Q5  BSS138  [SOT23]  8.89,38.8 90 bottom
Q6  BSS138  [SOT23]  8.89,41.97 90 bottom
Q7  BSS138  [SOT23]  8.89,62.93 90 bottom
Q8  BSS138  [SOT23]  8.89,66.1 90 bottom
Q9  BSS138  [SOT23]  8.89,69.28 90 bottom
R1  10k  [M0805]  7.09,3.89 0 bottom
R2  1k  [M0805]  8.26,25.45 180 top
R3  1k  [M0805]  4.19,25.48 0 top
R4  10k  [M0805]  12.7,15.46 180 bottom
R5  10k  [R0805]  1.47,12.78 270 bottom
R6  10k  [M0805]  21.89,5.62 90 bottom
R7  1k  [R0603]  20.7,2.6 0 bottom
R8  10k  [M0805]  12.7,11.33 180 bottom
R9  10k  [R0805]  1.5,8.74 90 bottom
R10  10k  [R0805]  2.86,16.26 0 bottom
R11  10k  [M0805]  12.7,13.4 180 bottom
R12  10k  [M0805]  21.85,9.63 90 bottom
R13  10k  [R0805]  25.24,18.95 180 top
R14  10k  [M0805]  7.09,31.19 0 bottom
R15  10k  [R0805]  2.86,43.56 0 bottom
R16  10k  [M0805]  12.7,40.7 180 bottom
R17  1k  [M0805]  8.26,52.76 180 top
R18  1k  [M0805]  4.19,52.78 0 top
R19  10k  [M0805]  12.7,42.77 180 bottom
R20  10k  [R0805]  1.47,40.08 270 bottom
R21  10k  [M0805]  21.89,32.92 90 bottom
R22  10k  [M0805]  12.7,38.64 180 bottom
R23  10k  [R0805]  1.5,36.04 90 bottom
R24  1k  [R0603]  20.7,29.91 0 bottom
R25  10k  [M0805]  21.85,36.94 90 bottom
R26  10k  [R0805]  25.24,46.26 180 top
R27  10k  [M0805]  7.09,58.5 0 bottom
R28  10k  [R0805]  2.86,70.87 0 bottom
R29  10k  [M0805]  12.7,68.01 180 bottom
R30  1k  [M0805]  8.26,80.06 180 top
R31  1k  [M0805]  4.19,80.09 0 top
R32  10k  [M0805]  12.7,70.07 180 bottom
R33  10k  [R0805]  1.47,67.39 270 bottom
R34  10k  [M0805]  21.89,60.23 90 bottom
R35  10k  [M0805]  12.7,65.94 180 bottom
R36  10k  [R0805]  1.5,63.35 90 bottom
R37  1k  [R0603]  20.7,57.21 0 bottom
R38  10k  [M0805]  21.85,64.24 90 bottom
R39  10k  [R0805]  25.24,73.56 180 top
R40  10k  [M0805]  38.79,5.92 90 top
R41  10k  [M0805]  38.8,11.37 180 top
R42  10k  [M0805]  38.8,9.14 180 top
R43  10k  [M0805]  41.97,10.1 90 top
R44  10k  [M0805]  33.72,10.1 270 top
R45  10k  [M0805]  38.79,33.1 90 top
R46  10k  [M0805]  38.8,38.54 180 top
R47  10k  [M0805]  38.8,36.32 180 top
R48  10k  [M0805]  41.97,37.27 90 top
R49  10k  [M0805]  33.72,37.27 270 top
R50  10k  [M0805]  38.66,60.4 90 top
R51  10k  [M0805]  38.67,65.85 180 top
R52  10k  [M0805]  38.67,63.63 180 top
R53  10k  [M0805]  41.85,64.58 90 top
R54  10k  [M0805]  33.59,64.58 270 top
R55  10k  [M0805]  69.93,15.38 0 top
R56  10k  [M0805]  75.37,15.37 90 top
R57  10k  [M0805]  73.15,15.37 90 top
R58  10k  [M0805]  74.1,12.19 0 top
R59  10k  [M0805]  74.1,20.45 180 top
R60  10k  [M0805]  69.93,42.68 0 top
R61  10k  [M0805]  75.37,42.67 90 top
R62  10k  [M0805]  73.15,42.67 90 top
R63  10k  [M0805]  74.1,39.5 0 top
R64  10k  [M0805]  74.1,47.75 180 top
R65  10k  [M0805]  69.93,69.99 0 top
R66  10k  [M0805]  75.37,69.98 90 top
R67  10k  [M0805]  73.15,69.98 90 top
R68  10k  [M0805]  74.1,66.8 0 top
R69  10k  [M0805]  74.1,75.06 180 top
SCL  [1,6/0,9]  36.58,13.27 90 top
SCL1  [1,6/0,9]  36.58,40.45 90 top
SCL2  [1,6/0,9]  36.45,67.75 90 top
SCL3  [1,6/0,9]  77.28,17.59 0 top
SCL4  [1,6/0,9]  77.28,44.89 0 top
SCL5  [1,6/0,9]  77.28,72.2 0 top
SDA  [1,6/0,9]  39.12,13.27 90 top
SDA1  [1,6/0,9]  39.12,40.45 90 top
SDA2  [1,6/0,9]  38.99,67.75 90 top
SDA3  [1,6/0,9]  77.28,15.05 0 top
SDA4  [1,6/0,9]  77.28,42.35 0 top
SDA5  [1,6/0,9]  77.28,69.66 0 top
VCC  [1,6/0,9]  28.96,13.27 90 top
VCC1  [1,6/0,9]  28.96,40.45 90 top
VCC2  [1,6/0,9]  28.83,67.75 90 top
VCC3  [1,6/0,9]  77.28,25.21 0 top
VCC4  [1,6/0,9]  77.28,52.51 0 top
VCC5  [1,6/0,9]  77.28,79.82 0 top
VNH2SP1  [MA07-1]  25.4,36.26 270 top
VNH2SP2  [MA07-1]  25.4,63.56 270 top
VNH2SP30  [MA07-1]  25.4,8.95 270 top
X1  BUS  [MICROMATCH-6]  30.23,7.24 90 top
X2  BUS  [MICROMATCH-6]  30.23,34.42 90 top
X3  BUS  [MICROMATCH-6]  30.1,61.72 90 top
X4  BUS  [MICROMATCH-6]  71.25,23.94 0 top
X5  BUS  [MICROMATCH-6]  71.25,51.24 0 top
X6  BUS  [MICROMATCH-6]  71.25,78.55 0 top

## Library data of the parts
10K 10K1 10K2 100K 100K1 100K2 R1-R4 R6-R8 R11 R12 R14 R16-R19 R21 R22 R24 R25 R27 R29-R32 R34 R35 R37 R38 R40-R69 = rcl; SPICEPREFIX: R
BUS BUS1 BUS2 = con-harting-ml; OC_FARNELL: unknown; OC_NEWARK: unknown
C1-C30 R5 R9 R10 R13 R15 R20 R23 R26 R28 R33 R36 R39 = rcl
CS CS1-CS5 DW3-DW8 GND GND1-GND5 GND_ GND_1-GND_5 INT INT0 INT1-INT10 P_UM P_UM1 P_UM2 PA0 PA1-PA29 PAD1-PAD300 PB0 PB1-PB11 SCL SCL1-SCL5 SDA SDA1-SDA5 VCC VCC1-VCC5 = wirepad
D1-D9 = diode
DW DW1 DW2 MA MA1 MA2 MB MB1 MB2 = jumper
IC1 IC4 IC9 IC13-IC18 = avr-7
IC2 IC5 IC7 IC8 IC11 IC12 = picogate
IC3 IC6 IC10 = linear
J_CS J_CS1-J_CS5 J_PA0 J_PA1 J_PA1A J_PA1A1 J_PA1A2 J_PA1B J_PA1B1 J_PA1B2 J_PA2-J_PA11 J_PB0 J_PB1 J_PB2 J_PB2A J_PB2A1 J_PB2A2 J_PB2B J_PB2B1 J_PB2B2 J_PWR J_PWR1 J_PWR2 JP1-JP11 JP13 = SparkFun-Jumpers
L1 L2 L298 M M1 M2 VNH2SP1 VNH2SP2 VNH2SP30 = con-lstb; OC_FARNELL: unknown; OC_NEWARK: unknown
LED LED1 LED2 = led
Q1-Q9 = bss138_10; MF: Fairchild; MPN: BSS138; OC_FARNELL: 9845330; OC_NEWARK: 67R2009
X1-X6 = con-amp-micromatch; MPN: 7-215464-6; OC_FARNELL: 3784630; OC_NEWARK: 19R8125

## Nets
BUS_INT: BUS.1 JP7.1 Q3.2 R10.2
BUS_INT1: BUS1.1 JP1.1 Q6.2 R15.2
BUS_INT2: BUS2.1 JP5.1 Q9.2 R28.2
BUS_INT3: IC13.8 INT.1 R43.2 X1.1
BUS_INT4: IC14.8 INT2.1 R48.2 X2.1
BUS_INT5: IC15.8 INT4.1 R53.2 X3.1
BUS_INT6: IC16.8 INT6.1 R58.2 X4.1
BUS_INT7: IC17.8 INT8.1 R63.2 X5.1
BUS_INT8: IC18.8 INT10.1 R68.2 X6.1
BUS_P1: CS1.1 J_CS1.2 R49.2 X2.5
BUS_P2: CS2.1 J_CS2.2 R54.2 X3.5
BUS_P3: CS3.1 J_CS3.2 R59.2 X4.5
BUS_P4: CS4.1 J_CS4.2 R64.2 X5.5
BUS_P5: CS.1 J_CS.2 R44.2 X1.5
BUS_P6: CS5.1 J_CS5.2 R69.2 X6.5
BUS_RESET: BUS.5 D2.C
BUS_RESET1: BUS1.5 D1.C
BUS_RESET2: BUS2.5 D3.C
BUS_RESET3: D4.C J_CS.3
BUS_RESET4: D5.C J_CS1.3
BUS_RESET5: D6.C J_CS2.3
BUS_RESET6: D7.C J_CS3.3
BUS_RESET7: D8.C J_CS4.3
BUS_RESET8: D9.C J_CS5.3
BUS_SCL: BUS.3 JP8.1 Q1.2 R5.2
BUS_SCL1: BUS1.3 JP2.1 Q4.2 R20.2
BUS_SCL2: BUS2.3 JP6.1 Q7.2 R33.2
BUS_SCL3: IC13.9 R42.2 SCL.1 X1.3
BUS_SCL4: IC14.9 R47.2 SCL1.1 X2.3
BUS_SCL5: IC15.9 R52.2 SCL2.1 X3.3
BUS_SCL6: IC16.9 R57.2 SCL3.1 X4.3
BUS_SCL7: IC17.9 R62.2 SCL4.1 X5.3
BUS_SCL8: IC18.9 R67.2 SCL5.1 X6.3
BUS_SDA: BUS.4 JP9.1 Q2.2 R9.2
BUS_SDA1: BUS1.4 JP3.1 Q5.2 R23.2
BUS_SDA2: BUS2.4 JP10.1 Q8.2 R36.2
BUS_SDA3: IC13.7 R41.2 SDA.1 X1.4
BUS_SDA4: IC14.7 R46.2 SDA1.1 X2.4
BUS_SDA5: IC15.7 R51.2 SDA2.1 X3.4
BUS_SDA6: IC16.7 R56.2 SDA3.1 X4.4
BUS_SDA7: IC17.7 R61.2 SDA4.1 X5.4
BUS_SDA8: IC18.7 R66.2 SDA5.1 X6.4
DEBUGWIRE: D2.A DW.1 IC1.4 R1.2
DEBUGWIRE1: D1.A DW1.1 IC4.4 R14.2
DEBUGWIRE2: D3.A DW2.1 IC9.4 R27.2
DW: D4.A DW3.1 IC13.4 R40.2
DW1: D5.A DW4.1 IC14.4 R45.2
DW2: D6.A DW5.1 IC15.4 R50.2
DW3: D7.A DW6.1 IC16.4 R55.2
DW4: D8.A DW7.1 IC17.4 R60.2
DW5: D9.A DW8.1 IC18.4 R65.2
GND: 10K.1 BUS.6 C1.1 C2.2 C3.2 C4.1 C5.2 C6.1 C8.2 C10.- DW.2 IC1.14 IC2.3 IC3.2 IC5.3 L298.3 M.5 M.6 PAD1.1 R12.1 VNH2SP30.2
GND1: 10K1.1 BUS1.6 C7.1 C9.2 C11.2 C12.1 C13.2 C14.2 C15.- C16.1 DW1.2 IC4.14 IC6.2 IC7.3 IC8.3 L1.3 M1.5 M1.6 PAD2.1 R25.1 VNH2SP1.2
GND2: 10K2.1 BUS2.6 C17.1 C18.2 C19.2 C20.1 C21.2 C22.2 C23.- C24.1 DW2.2 IC9.14 IC10.2 IC11.3 IC12.3 L2.3 M2.5 M2.6 PAD3.1 R38.1 VNH2SP2.2
GND3: C25.2 GND.1 GND_.1 IC13.14 PAD100.1 PAD101.1 PAD102.1 X1.6
GND4: C26.2 GND1.1 GND_1.1 IC14.14 PAD175.1 PAD176.1 PAD177.1 X2.6
GND5: C27.2 GND2.1 GND_2.1 IC15.14 PAD262.1 PAD263.1 PAD264.1 X3.6
GND6: C28.2 GND3.1 GND_3.1 IC16.14 PAD274.1 PAD275.1 PAD276.1 X4.6
GND7: C29.2 GND4.1 GND_4.1 IC17.14 PAD286.1 PAD287.1 PAD288.1 X5.6
GND8: C30.2 GND5.1 GND_5.1 IC18.14 PAD298.1 PAD299.1 PAD300.1 X6.6
INT0: IC13.5 INT0.1 J_CS.1
INT1: IC14.5 INT1.1 J_CS1.1
INT2: IC15.5 INT3.1 J_CS2.1
INT3: IC16.5 INT5.1 J_CS3.1
INT4: IC17.5 INT7.1 J_CS4.1
INT5: IC18.5 INT9.1 J_CS5.1
INT_MISO: IC1.8 JP7.2 JP13.1 L298.5 Q3.3 R4.1
INT_MISO1: IC4.8 JP1.2 JP4.1 L1.5 Q6.3 R19.1
INT_MISO2: IC9.8 JP5.2 JP11.1 L2.5 Q9.3 R32.1
MA_A: IC2.2 J_PA0.1 J_PA2.3 L298.6 VNH2SP30.5
MA_A1: IC8.2 J_PA1.1 J_PA4.3 L1.6 VNH2SP1.5
MA_A2: IC12.2 J_PA8.1 J_PA9.3 L2.6 VNH2SP2.5
MA_B: IC2.4 J_PB0.3 J_PB2B.1 L298.4 VNH2SP30.6
MA_B1: IC8.4 J_PB1.3 J_PB2B1.1 L1.4 VNH2SP1.6
MA_B2: IC12.4 J_PB2.3 J_PB2B2.1 L2.4 VNH2SP2.6
MA_CS: R6.1 VNH2SP30.4
MA_CS1: R21.1 VNH2SP1.4
MA_CS2: R34.1 VNH2SP2.4
MA_CS_: C4.2 IC1.10 J_PA3.2 R6.2 R12.2
MA_CS_1: C12.2 IC4.10 J_PA5.2 R21.2 R25.2
MA_CS_2: C20.2 IC9.10 J_PA10.2 R34.2 R38.2
MA_E1: M.9 R3.2
MA_E1_: C3.1 J_PA1A.3 J_PB2A.1 R3.1
MA_E1_1: C11.1 J_PA1A1.3 J_PB2A1.1 R18.1
MA_E1_2: C19.1 J_PA1A2.3 J_PB2A2.1 R31.1
MA_E2: J_PA1B.2 J_PB0.1 M.11
MA_E3: M1.9 R18.2
MA_E4: J_PA1B1.2 J_PB1.1 M1.11
MA_E5: M2.9 R31.2
MA_E6: J_PA1B2.2 J_PB2.1 M2.11
MA_EN__MB_A: IC1.3 IC5.2 L298.10 VNH2SP30.3
MA_EN__MB_A1: IC4.3 IC7.2 L1.10 VNH2SP1.3
MA_EN__MB_A2: IC9.3 IC11.2 L2.10 VNH2SP2.3
MA_N [power]: M.3 MA.1
MA_N1 [power]: M1.3 MA1.1
MA_N2 [power]: M2.3 MA2.1
MA_P [power]: M.1 MA.2
MA_P1 [power]: M1.1 MA1.2
MA_P2 [power]: M2.1 MA2.2
MA_PWM: J_PA1A.1 J_PB2A.3 L298.2 VNH2SP30.7
MA_PWM1: J_PA1A1.1 J_PB2A1.3 L1.2 VNH2SP1.7
MA_PWM2: J_PA1A2.1 J_PB2A2.3 L2.2 VNH2SP2.7
MB_B: IC5.4 J_PA3.3 L298.8
MB_B1: IC7.4 J_PA5.3 L1.8
MB_B2: IC11.4 J_PA10.3 L2.8
MB_E1: M.10 R2.2
MB_E1_: C1.2 J_PA0.3 J_PA7.1 R2.1
MB_E1_1: C7.2 J_PA1.3 J_PA6.1 R17.1
MB_E1_2: C17.2 J_PA8.3 J_PA11.1 R30.1
MB_E2: J_PA3.1 M.12
MB_E3: J_PA5.1 M1.12
MB_E4: M1.10 R17.2
MB_E5: J_PA10.1 M2.12
MB_E6: M2.10 R30.2
MB_N [power]: M.4 MB.2
MB_N1 [power]: M1.4 MB1.2
MB_N2 [power]: M2.4 MB2.2
MB_P [power]: M.2 MB.1
MB_P1 [power]: M1.2 MB1.1
MB_P2 [power]: M2.2 MB2.1
MB_PWM: J_PA2.1 J_PA7.3 L298.12
MB_PWM1: J_PA4.1 J_PA6.3 L1.12
MB_PWM2: J_PA9.1 J_PA11.3 L2.12
N$1: LED1.A R24.1
N$2: 100K.1 P_UM.1
N$3: IC7.1 IC8.1 JP4.2 R26.1
N$4: IC2.1 IC5.1 JP13.2 R13.1
N$5: 100K1.1 P_UM1.1
N$6: LED.A R7.1
N$7: LED2.A R37.1
N$8: IC11.1 IC12.1 JP11.2 R39.1
N$9: 100K2.1 P_UM2.1
PA0: 10K.2 100K.2 C6.2 IC1.13 J_PA0.2 LED.C
PA1: IC1.12 J_PA1A.2 J_PA1B.1
PA2: IC1.11 J_PA2.2
PA3: 10K1.2 100K1.2 C16.2 IC4.13 J_PA1.2 LED1.C
PA4: IC4.12 J_PA1A1.2 J_PA1B1.1
PA5: IC4.11 J_PA4.2
PA6: IC4.6 J_PA6.2
PA7: IC1.6 J_PA7.2
PA8: 10K2.2 100K2.2 C24.2 IC9.13 J_PA8.2 LED2.C
PA9: IC9.12 J_PA1A2.2 J_PA1B2.1
PA10: IC9.11 J_PA9.2
PA11: IC9.6 J_PA11.2
PA12: IC13.13 PA0.1
PA13: IC13.6 PA7.1
PA14: IC13.10 PA3.1
PA15: IC13.11 PA2.1
PA16: IC13.12 PA1.1
PA17: IC14.13 PA4.1
PA18: IC14.6 PA9.1
PA19: IC14.10 PA8.1
PA20: IC14.11 PA6.1
PA21: IC14.12 PA5.1
PA22: IC15.13 PA10.1
PA23: IC15.6 PA14.1
PA24: IC15.10 PA13.1
PA25: IC15.11 PA12.1
PA26: IC15.12 PA11.1
PA27: IC16.13 PA15.1
PA28: IC16.6 PA19.1
PA29: IC16.10 PA18.1
PA30: IC16.11 PA17.1
PA31: IC16.12 PA16.1
PA32: IC17.13 PA20.1
PA33: IC17.6 PA24.1
PA34: IC17.10 PA23.1
PA35: IC17.11 PA22.1
PA36: IC17.12 PA21.1
PA37: IC18.13 PA25.1
PA38: IC18.6 PA29.1
PA39: IC18.10 PA28.1
PA40: IC18.11 PA27.1
PA41: IC18.12 PA26.1
PB0: IC1.2 J_PB0.2
PB1: IC4.2 J_PB1.2
PB2: IC1.5 J_PB2A.2 J_PB2B.2
PB3: IC4.5 J_PB2A1.2 J_PB2B1.2
PB4: IC9.2 J_PB2.2
PB5: IC9.5 J_PB2A2.2 J_PB2B2.2
PB6: IC13.3 PB1.1
PB7: IC13.2 PB0.1
PB8: IC14.3 PB3.1
PB9: IC14.2 PB2.1
PB10: IC15.3 PB5.1
PB11: IC15.2 PB4.1
PB12: IC16.3 PB7.1
PB13: IC16.2 PB6.1
PB14: IC17.3 PB9.1
PB15: IC17.2 PB8.1
PB16: IC18.3 PB11.1
PB17: IC18.2 PB10.1
SCL_SCK: IC1.9 JP8.2 L298.7 Q1.3 R8.1
SCL_SCK1: IC4.9 JP2.2 L1.7 Q4.3 R22.1
SCL_SCK2: IC9.9 JP6.2 L2.7 Q7.3 R35.1
SDA_MOSI: IC1.7 JP9.2 L298.9 Q2.3 R11.1
SDA_MOSI1: IC4.7 JP3.2 L1.9 Q5.3 R16.1
SDA_MOSI2: IC9.7 JP10.2 L2.9 Q8.3 R29.1
U1: C13.1 IC6.1 J_PWR1.1 L1.1 L1.11 VNH2SP1.1
U2: C21.1 IC10.1 J_PWR2.1 L2.1 L2.11 VNH2SP2.1
U5: C5.1 IC3.1 J_PWR.1 L298.1 L298.11 VNH2SP30.1
U_BUS: BUS.2 J_PWR.3 Q1.1 Q2.1 Q3.1 R5.1 R9.1 R10.1
U_BUS1: BUS1.2 J_PWR1.3 Q4.1 Q5.1 Q6.1 R15.1 R20.1 R23.1
U_BUS2: BUS2.2 J_PWR2.3 Q7.1 Q8.1 Q9.1 R28.1 R33.1 R36.1
VCC: C2.1 C8.1 C10.+ IC1.1 IC2.5 IC3.3 IC5.5 J_PWR.2 M.7 M.8 R1.1 R4.2 R7.2 R8.2 R11.2 R13.2
VCC1: C9.1 C14.1 C15.+ IC4.1 IC6.3 IC7.5 IC8.5 J_PWR1.2 M1.7 M1.8 R14.1 R16.2 R19.2 R22.2 R24.2 R26.2
VCC2: C18.1 C22.1 C23.+ IC9.1 IC10.3 IC11.5 IC12.5 J_PWR2.2 M2.7 M2.8 R27.1 R29.2 R32.2 R35.2 R37.2 R39.2
VCC3: C25.1 IC13.1 R40.1 R41.1 R42.1 R43.1 R44.1 VCC.1 X1.2
VCC4: C26.1 IC14.1 R45.1 R46.1 R47.1 R48.1 R49.1 VCC1.1 X2.2
VCC5: C27.1 IC15.1 R50.1 R51.1 R52.1 R53.1 R54.1 VCC2.1 X3.2
VCC6: C28.1 IC16.1 R55.1 R56.1 R57.1 R58.1 R59.1 VCC3.1 X4.2
VCC7: C29.1 IC17.1 R60.1 R61.1 R62.1 R63.1 R64.1 VCC4.1 X5.2
VCC8: C30.1 IC18.1 R65.1 R66.1 R67.1 R68.1 R69.1 VCC5.1 X6.2

## Tracks (layer width: path | path; a pad name or v marks a point on that pad's centre or on a via)
BUS_INT
  Bottom 0.254: R10.2 2.06,16.1 | 2.06,16.1 3.17,14.99 BUS.1 | 2.06,16.1 2.88,16.91 2.88,17.12 3.04,17.29 4.57,17.29 4.74,17.12 4.74,14.46 4.72,14.44 4.72,13.62 5.3,13.04 6.12,13.04 6.71,13.62 6.71,14.43 Q3.2 8.19,15.91 JP7.1
BUS_INT1
  Bottom 0.254: R15.2 2.06,43.4 | 2.06,43.4 3.17,42.29 BUS1.1 | 2.06,43.4 2.88,44.22 2.88,44.43 3.04,44.59 4.57,44.59 4.74,44.43 4.74,41.76 4.72,41.75 4.72,40.93 5.3,40.35 6.12,40.35 6.71,40.93 6.71,41.74 Q6.2 8.19,43.22 JP1.1
BUS_INT2
  Bottom 0.254: R28.2 2.06,70.71 | 2.06,70.71 3.17,69.6 BUS2.1 | 2.06,70.71 2.88,71.52 2.88,71.73 3.04,71.9 4.57,71.9 4.74,71.73 4.74,69.07 4.72,69.05 4.72,68.23 5.3,67.65 6.12,67.65 6.71,68.23 6.71,69.04 Q9.2 8.19,70.52 JP5.1
BUS_INT3  (via drill 0.35)
  Top 0.127: v37.85,13.81 38.22,13.81 38.7,14.29 39.54,14.29 40.13,13.69 40.13,13.36 41.49,12 v43.24,12 42.93,12 R43.2 | INT.1 34.67,12.64 34.67,12 34.84,11.83 v35.26,11.83
  Bottom 0.127: IC13.8 42.35,12 v43.24,12 | v37.85,13.81 37.59,13.56 37.59,12.85 36.58,11.83 v35.26,11.83
  Bottom 0.406: INT.1 32.77,14.54 30.23,14.54 30.23,11.68 X1.1
BUS_INT4  (via drill 0.35)
  Top 0.127: v37.85,40.99 38.22,40.99 38.7,41.47 39.54,41.47 40.13,40.87 40.13,40.54 41.49,39.18 v43.24,39.18 42.93,39.18 R48.2 | INT2.1 34.67,39.81 34.67,39.18 34.84,39.01 v35.26,39.01
  Bottom 0.127: IC14.8 42.35,39.18 v43.24,39.18 | v37.85,40.99 37.59,40.74 37.59,40.03 36.58,39.01 v35.26,39.01
  Bottom 0.406: INT2.1 32.77,41.72 30.23,41.72 30.23,38.86 X2.1
BUS_INT5  (via drill 0.35)
  Top 0.127: v37.72,68.29 38.09,68.29 38.57,68.77 39.41,68.77 40.01,68.18 40.01,67.84 41.36,66.48 v43.12,66.48 42.8,66.48 R53.2 | INT4.1 34.54,67.12 34.54,66.48 34.71,66.32 v35.13,66.32
  Bottom 0.127: IC15.8 42.23,66.48 v43.12,66.48 | v37.72,68.29 37.47,68.04 37.47,67.33 36.45,66.32 v35.13,66.32
  Bottom 0.406: INT4.1 32.64,69.02 30.1,69.02 30.1,66.17 X3.1
BUS_INT6  (via drill 0.35)
  Top 0.127: v77.82,16.32 77.82,15.95 78.3,15.47 78.3,14.63 77.7,14.03 77.37,14.03 76.01,12.68 v76.01,10.92 76.01,11.24 R58.2 | INT6.1 76.64,19.49 76.01,19.49 75.84,19.33 v75.84,18.91
  Bottom 0.127: IC16.8 76.01,11.81 v76.01,10.92 | v77.82,16.32 77.57,16.57 76.86,16.57 75.84,17.59 v75.84,18.91
  Bottom 0.406: INT6.1 78.55,21.4 78.55,23.94 75.69,23.94 X4.1
BUS_INT7  (via drill 0.35)
  Top 0.127: v77.82,43.62 77.82,43.25 78.3,42.78 78.3,41.93 77.7,41.34 77.37,41.34 76.01,39.98 v76.01,38.23 76.01,38.54 R63.2 | INT8.1 76.64,46.8 76.01,46.8 75.84,46.63 v75.84,46.21
  Bottom 0.127: IC17.8 76.01,39.12 v76.01,38.23 | v77.82,43.62 77.57,43.88 76.86,43.88 75.84,44.9 v75.84,46.21
  Bottom 0.406: INT8.1 78.55,48.7 78.55,51.24 75.69,51.24 X5.1
BUS_INT8  (via drill 0.35)
  Top 0.127: v77.82,70.93 77.82,70.56 78.3,70.08 78.3,69.24 77.7,68.64 77.37,68.64 76.01,67.29 v76.01,65.53 76.01,65.85 R68.2 | INT10.1 76.64,74.1 76.01,74.1 75.84,73.94 v75.84,73.52
  Bottom 0.127: IC18.8 76.01,66.42 v76.01,65.53 | v77.82,70.93 77.57,71.18 76.86,71.18 75.84,72.2 v75.84,73.52
  Bottom 0.406: INT10.1 78.55,76.01 78.55,78.55 75.69,78.55 X6.1
BUS_P1  (via drill 0.35)
  Top 0.127: R49.2 35.8,38.41 35.8,39.24 35.31,39.73 35.31,41.29 v35.26,41.33 | v40.62,41.62 41.66,40.58 CS1.1
  Top 0.406: R49.2 32.45,35.05 30.86,35.05 28.96,33.15 X2.5
  Bottom 0.127: v35.26,41.33 35.67,41.74 37.44,41.74 37.51,41.81 40.43,41.81 v40.62,41.62
  Bottom 0.406: J_CS1.2 29.59,31.88 X2.5
BUS_P2  (via drill 0.35)
  Top 0.127: R54.2 35.67,65.71 35.67,66.54 35.18,67.04 35.18,68.59 v35.13,68.64 | v40.49,68.92 41.53,67.89 CS2.1
  Top 0.406: R54.2 32.32,62.36 30.73,62.36 28.83,60.45 X3.5
  Bottom 0.127: v35.13,68.64 35.54,69.05 37.31,69.05 37.38,69.12 40.3,69.12 v40.49,68.92
  Bottom 0.406: J_CS2.2 29.46,59.18 X3.5
BUS_P3  (via drill 0.35)
  Top 0.127: R59.2 75.24,18.36 76.07,18.36 76.56,18.86 78.11,18.86 v78.17,18.91 | v78.45,13.55 77.41,12.51 CS3.1
  Top 0.406: R59.2 71.88,21.72 71.88,23.3 69.98,25.21 X4.5
  Bottom 0.127: v78.17,18.91 78.58,18.5 78.58,16.73 78.64,16.66 78.64,13.74 v78.45,13.55
  Bottom 0.406: J_CS3.2 68.71,24.57 X4.5
BUS_P4  (via drill 0.35)
  Top 0.127: R64.2 75.24,45.67 76.07,45.67 76.56,46.16 78.11,46.16 v78.17,46.21 | v78.45,40.85 77.41,39.81 CS4.1
  Top 0.406: R64.2 71.88,49.02 71.88,50.61 69.98,52.51 X5.5
  Bottom 0.127: v78.17,46.21 78.58,45.8 78.58,44.03 78.64,43.97 78.64,41.04 v78.45,40.85
  Bottom 0.406: J_CS4.2 68.71,51.88 X5.5
BUS_P5  (via drill 0.35)
  Top 0.127: R44.2 35.8,11.23 35.8,12.06 35.31,12.55 35.31,14.11 v35.26,14.16 | v40.62,14.44 41.66,13.4 CS.1
  Top 0.406: R44.2 32.45,7.87 30.86,7.87 28.96,5.97 X1.5
  Bottom 0.127: v35.26,14.16 35.67,14.57 37.44,14.57 37.51,14.63 40.43,14.63 v40.62,14.44
  Bottom 0.406: J_CS.2 29.59,4.7 X1.5
BUS_P6  (via drill 0.35)
  Top 0.127: R69.2 75.24,72.97 76.07,72.97 76.56,73.47 78.11,73.47 v78.17,73.52 | v78.45,68.16 77.41,67.12 CS5.1
  Top 0.406: R69.2 71.88,76.33 71.88,77.91 69.98,79.82 X6.5
  Bottom 0.127: v78.17,73.52 78.58,73.11 78.58,71.34 78.64,71.27 78.64,68.35 v78.45,68.16
  Bottom 0.406: J_CS5.2 68.71,79.18 X6.5
BUS_RESET
  Bottom 0.254: BUS.5 3.17,6.21 D2.C
BUS_RESET1
  Bottom 0.254: BUS1.5 3.17,33.51 D1.C
BUS_RESET2
  Bottom 0.254: BUS2.5 3.17,60.82 D3.C
BUS_RESET3  (via drill 0.35)
  Top 0.406: v34.67,2.5 35.76,2.5 D4.C
  Bottom 0.406: J_CS.3 31.02,2.5 v34.67,2.5
BUS_RESET4  (via drill 0.35)
  Top 0.406: v34.67,29.68 35.76,29.68 D5.C
  Bottom 0.406: J_CS1.3 31.02,29.68 v34.67,29.68
BUS_RESET5  (via drill 0.35)
  Top 0.406: v34.54,56.98 35.63,56.98 D6.C
  Bottom 0.406: J_CS2.3 30.89,56.98 v34.54,56.98
BUS_RESET6  (via drill 0.35)
  Top 0.406: v66.51,19.49 66.51,18.41 D7.C
  Bottom 0.406: J_CS3.3 66.51,23.15 v66.51,19.49
BUS_RESET7  (via drill 0.35)
  Top 0.406: v66.51,46.8 66.51,45.71 D8.C
  Bottom 0.406: J_CS4.3 66.51,50.45 v66.51,46.8
BUS_RESET8  (via drill 0.35)
  Top 0.406: v66.51,74.1 66.51,73.02 D9.C
  Bottom 0.406: J_CS5.3 66.51,77.76 v66.51,74.1
BUS_SCL  (via drill 0.3)
  Top 0.254: v4.35,10.95 5.36,9.94 6.12,9.94 6.13,9.94 v6.38,9.94
  Bottom 0.254: R5.2 2.84,11.83 BUS.3 3.81,11.49 v4.35,10.95 | JP8.1 8.21,9.59 Q1.2 7.22,9.94 v6.38,9.94
BUS_SCL1  (via drill 0.3)
  Top 0.254: v4.35,38.26 5.36,37.25 6.12,37.25 6.13,37.24 v6.38,37.24
  Bottom 0.254: R20.2 2.84,39.13 BUS1.3 3.81,38.8 v4.35,38.26 | JP2.1 8.21,36.89 Q4.2 7.22,37.24 v6.38,37.24
BUS_SCL2  (via drill 0.3)
  Top 0.254: v4.35,65.56 5.36,64.55 6.12,64.55 6.13,64.55 v6.38,64.55
  Bottom 0.254: R33.2 2.84,66.44 BUS2.3 3.81,66.1 v4.35,65.56 | JP6.1 8.21,64.2 Q7.2 7.22,64.55 v6.38,64.55
BUS_SCL3  (via drill 0.35)
  Top 0.127: 36.58,13.91 35.78,14.7 33.83,14.7 32.77,13.64 32.77,12.91 31.98,12.12 31.62,12.12
  Top 0.406: 36.58,13.91 SCL.1 36.58,9.46 36.89,9.14 R42.2 | 31.62,12.12 v31.5,11.99 | v30.91,10.17 28.96,8.22 X1.3
  Bottom 0.127: IC13.9 40.93,9.31 40.09,9.31 39.8,9.02 39.8,7.86 37.27,5.33 34.52,5.33 34.16,4.98 31.64,4.98 30.62,5.99 30.62,9.88 v30.91,10.17
  Bottom 0.406: v31.5,11.99 31.5,10.76 v30.91,10.17
BUS_SCL4  (via drill 0.35)
  Top 0.127: 36.58,41.08 35.78,41.88 33.83,41.88 32.77,40.81 32.77,40.09 31.98,39.29 31.62,39.29
  Top 0.406: 36.58,41.08 SCL1.1 36.58,36.64 36.89,36.32 R47.2 | 31.62,39.29 v31.5,39.17 | v30.91,37.35 28.96,35.39 X2.3
  Bottom 0.127: IC14.9 40.93,36.49 40.09,36.49 39.8,36.2 39.8,35.04 37.27,32.51 34.52,32.51 34.16,32.16 31.64,32.16 30.62,33.17 30.62,37.06 v30.91,37.35
  Bottom 0.406: v31.5,39.17 31.5,37.93 v30.91,37.35
BUS_SCL5  (via drill 0.35)
  Top 0.127: 36.45,68.39 35.66,69.18 33.7,69.18 32.64,68.12 32.64,67.39 31.85,66.6 31.49,66.6
  Top 0.406: 36.45,68.39 SCL2.1 36.45,63.94 36.77,63.63 R52.2 | 31.49,66.6 v31.37,66.47 | v30.78,64.65 28.83,62.7 X3.3
  Bottom 0.127: IC15.9 40.8,63.79 39.97,63.79 39.67,63.5 39.67,62.34 37.15,59.82 34.39,59.82 34.04,59.46 31.51,59.46 30.49,60.48 30.49,64.36 v30.78,64.65
  Bottom 0.406: v31.37,66.47 31.37,65.24 v30.78,64.65
BUS_SCL6  (via drill 0.35)
  Top 0.127: 77.92,17.59 78.71,18.38 78.71,20.34 77.64,21.4 76.92,21.4 76.12,22.19 76.12,22.55
  Top 0.406: 77.92,17.59 SCL3.1 73.47,17.59 73.15,17.27 R57.2 | 76.12,22.55 v76,22.67 | v74.18,23.26 72.22,25.21 X4.3
  Bottom 0.127: IC16.9 73.32,13.23 73.32,14.07 73.03,14.36 71.87,14.36 69.34,16.89 69.34,19.65 68.99,20 68.99,22.53 70,23.55 73.89,23.55 v74.18,23.26
  Bottom 0.406: v76,22.67 74.76,22.67 v74.18,23.26
BUS_SCL7  (via drill 0.35)
  Top 0.127: 77.92,44.89 78.71,45.69 78.71,47.64 77.64,48.7 76.92,48.7 76.12,49.5 76.12,49.85
  Top 0.406: 77.92,44.89 SCL4.1 73.47,44.89 73.15,44.58 R62.2 | 76.12,49.85 v76,49.97 | v74.18,50.56 72.22,52.51 X5.3
  Bottom 0.127: IC17.9 73.32,40.54 73.32,41.38 73.03,41.67 71.87,41.67 69.34,44.2 69.34,46.95 68.99,47.31 68.99,49.83 70,50.85 73.89,50.85 v74.18,50.56
  Bottom 0.406: v76,49.97 74.76,49.97 v74.18,50.56
BUS_SCL8  (via drill 0.35)
  Top 0.127: 77.92,72.2 78.71,72.99 78.71,74.95 77.64,76.01 76.92,76.01 76.12,76.8 76.12,77.16
  Top 0.406: 77.92,72.2 SCL5.1 73.47,72.2 73.15,71.88 R67.2 | 76.12,77.16 v76,77.28 | v74.18,77.87 72.22,79.82 X6.3
  Bottom 0.127: IC18.9 73.32,67.84 73.32,68.68 73.03,68.97 71.87,68.97 69.34,71.5 69.34,74.26 68.99,74.61 68.99,77.14 70,78.16 73.89,78.16 v74.18,77.87
  Bottom 0.406: v76,77.28 74.76,77.28 v74.18,77.87
BUS_SDA
  Bottom 0.254: R9.2 2.51,9.69 2.77,9.94 4.17,9.94 BUS.4 6.45,12.23 6.46,12.23 6.67,12.44 Q2.2 8.19,12.74 JP9.1
BUS_SDA1
  Bottom 0.254: R23.2 2.51,36.99 2.77,37.25 4.17,37.25 BUS1.4 6.45,39.54 6.46,39.54 6.67,39.75 Q5.2 8.19,40.04 JP3.1
BUS_SDA2
  Bottom 0.254: R36.2 2.51,64.3 2.77,64.55 4.17,64.55 BUS2.4 6.45,66.84 6.46,66.84 6.67,67.05 Q8.2 8.19,67.35 JP10.1
BUS_SDA3  (via drill 0.35)
  Top 0.127: v37.85,12 R41.2 37.53,11.05 v37.26,11.05
  Top 0.406: v37.85,12 SDA.1
  Bottom 0.127: IC13.7 v37.26,11.05
  Bottom 0.406: IC13.7 33.72,11.05 32.51,9.84 32.51,8.72 31.5,7.71 X1.4
BUS_SDA4  (via drill 0.35)
  Top 0.127: v37.85,39.18 R46.2 37.53,38.23 v37.26,38.23
  Top 0.406: v37.85,39.18 SDA1.1
  Bottom 0.127: IC14.7 v37.26,38.23
  Bottom 0.406: IC14.7 33.72,38.23 32.51,37.02 32.51,35.9 31.5,34.89 X2.4
BUS_SDA5  (via drill 0.35)
  Top 0.127: v37.72,66.48 R51.2 37.4,65.53 v37.13,65.53
  Top 0.406: v37.72,66.48 v37.72,66.49 SDA2.1
  Bottom 0.127: IC15.7 v37.13,65.53
  Bottom 0.406: IC15.7 33.59,65.53 32.38,64.33 32.38,63.21 31.37,62.19 X3.4
BUS_SDA6  (via drill 0.35)
  Top 0.127: v76.01,16.32 R56.2 75.06,16.63 v75.06,16.91
  Top 0.406: v76.01,16.32 SDA3.1
  Bottom 0.127: IC16.7 v75.06,16.91
  Bottom 0.406: IC16.7 75.06,20.45 73.85,21.65 72.73,21.65 71.72,22.67 X4.4
BUS_SDA7  (via drill 0.35)
  Top 0.127: v76.01,43.62 R61.2 75.06,43.94 v75.06,44.21
  Top 0.406: v76.01,43.62 SDA4.1
  Bottom 0.127: IC17.7 v75.06,44.21
  Bottom 0.406: IC17.7 75.06,47.75 73.85,48.96 72.73,48.96 71.72,49.97 X5.4
BUS_SDA8  (via drill 0.35)
  Top 0.127: v76.01,70.93 R66.2 75.06,71.24 v75.06,71.52
  Top 0.406: v76.01,70.93 SDA5.1
  Bottom 0.127: IC18.7 v75.06,71.52
  Bottom 0.406: IC18.7 75.06,75.06 73.85,76.26 72.73,76.26 71.72,77.28 X6.4
DEBUGWIRE  (via drill 0.3)
  Top 0.127: DW.1 1.96,2.58 4.12,0.41 14.37,0.41 14.61,0.65 14.61,1.16 v14.55,1.21
  Bottom 0.127: 6.15,4.25 6.15,5.72 D2.A | 6.15,4.25 6.15,3.91 R1.2 6.15,4.25 | 6.15,4.25 3.56,4.25 1.96,2.65 DW.1 | IC1.4 14.61,1.26 v14.55,1.21
DEBUGWIRE1  (via drill 0.3)
  Top 0.127: DW1.1 1.96,29.88 4.12,27.72 14.37,27.72 14.61,27.95 14.61,28.47 v14.55,28.52
  Bottom 0.127: 6.15,31.56 6.15,33.03 D1.A | 6.15,31.56 6.15,31.21 R14.2 6.15,31.56 | 6.15,31.56 3.56,31.56 1.96,29.95 DW1.1 | IC4.4 14.61,28.57 v14.55,28.52
DEBUGWIRE2  (via drill 0.3)
  Top 0.127: DW2.1 1.96,57.19 4.12,55.02 14.37,55.02 14.61,55.26 14.61,55.77 v14.55,55.82
  Bottom 0.127: 6.15,58.86 6.15,60.33 D3.A | 6.15,58.86 6.15,58.52 R27.2 6.15,58.86 | 6.15,58.86 3.56,58.86 1.96,57.26 DW2.1 | IC9.4 14.61,55.87 v14.55,55.82
DW  (via drill 0.35)
  Top 0.406: D4.A 36.2,6.46 | 36.2,6.46 IC13.4 | R40.2 38.38,6.46 36.2,6.46
  Bottom 0.406: DW3.1 34.99,7.24 IC13.4
  other vias: 36.2,7.24
DW1  (via drill 0.35)
  Top 0.406: D5.A 36.2,33.64 | 36.2,33.64 IC14.4 | R45.2 38.38,33.64 36.2,33.64
  Bottom 0.406: DW4.1 34.99,34.42 IC14.4
  other vias: 36.2,34.42
DW2  (via drill 0.35)
  Top 0.406: D6.A 36.07,60.95 | 36.07,60.95 IC15.4 | R50.2 38.25,60.95 36.07,60.95
  Bottom 0.406: DW5.1 34.86,61.72 IC15.4
  other vias: 36.07,61.72
DW3  (via drill 0.35)
  Top 0.406: D7.A 70.47,17.97 | 70.47,17.97 IC16.4 | R55.2 70.47,15.79 70.47,17.97
  Bottom 0.406: DW6.1 71.25,19.18 IC16.4
  other vias: 71.25,17.97
DW4  (via drill 0.35)
  Top 0.406: D8.A 70.47,45.28 | 70.47,45.28 IC17.4 | R60.2 70.47,43.09 70.47,45.28
  Bottom 0.406: DW7.1 71.25,46.48 IC17.4
  other vias: 71.25,45.28
DW5  (via drill 0.35)
  Top 0.406: D9.A 70.47,72.58 | 70.47,72.58 IC18.4 | R65.2 70.47,70.4 70.47,72.58
  Bottom 0.406: DW8.1 71.25,73.79 IC18.4
  other vias: 71.25,72.58
GND  (via drill 0.3, 0.35)
  Top 0.127: IC3.2 20.89,9.35 22.49,7.75 v23.05,7.75 | 5.73,2.58 4.47,2.58 DW.2 | 5.73,2.58 6.5,2.58 C10.- | 5.73,2.58 5.73,8.93 BUS.6 5.66,9 4.47,9 2.93,10.54 2.79,10.54 2.23,11.1 2.23,17.32 v2.58,17.67 | 5.73,2.58 C10.- | 24.17,23.95 24.17,25.77 PAD1.1 | 24.17,23.95 24.17,23.81 IC5.3 24.17,23.95 | 24.17,23.95 21.09,23.95 20.12,22.97 19.07,22.97 L298.3 19,22.97 19,23.46 15.65,26.82 12.29,26.82 10.2,24.72 10.2,22.97 M.5 | v22.84,20.88 22.84,22.28 v22.77,22.35 | C10.- 7.19,1.97 v7.19,1.71 | v11.23,17.84 10.16,18.91 M.6
  Top 0.15: 10K.1 C6.1 10.98,15.14 v10.62,15.49
  Bottom 0.127: C2.2 19.77,6.7 19.77,8.1 19.56,8.31 C4.1 | v23.05,7.75 22.84,7.75 21.93,8.66 R12.1 21.86,8.79 23.61,10.54 23.61,12.29 25.36,14.03 VNH2SP30.2 25.29,14.03 23.61,15.71 23.61,16.97 24.24,17.6 24.24,18.92 C8.2 24.24,18.99 24.24,19.48 v22.84,20.88 | C3.2 5.17,25.49 7.26,25.49 C1.1 7.33,25.49 7.47,25.49 8.45,26.47 10.27,26.47 10.9,25.84 10.9,23.74 10.2,23.04 M.5 | IC2.3 25.98,23.81 25.98,24.09 24.31,25.77 24.17,25.77 PAD1.1 24.52,25.49 22.77,23.74 v22.77,22.35 | v2.58,17.67 5.24,17.67 6.84,19.27 8.38,19.27 9.36,18.29 C5.2 | v10.62,15.49 10.62,16.92 10.86,17.15 10.86,17.47 v11.23,17.84
  Bottom 0.254: M.5 M.6 10.16,18.98 C5.2 | IC1.14 19.52,8.38 C4.1 R12.1
  other vias: 4.83,5.93 4.8,7.99 6.78,8.04 1.27,24.83 1.27,26.1 8.89,21.65 20.32,19.11 26.67,12.76 26.67,10.22 26.67,7.68 26.67,5.14 26.67,2.6 13.97,4.83 18.62,1.03 22.99,2.4 23.5,4.51
  pour Top: 0,0.06 27.62,0.06 27.62,27.37 0,27.37
  pour Bottom: 0,0.06 27.62,0.06 27.62,27.37 0,27.37
GND1  (via drill 0.3, 0.35)